# Altium PCB LED_Sequencer.PcbDoc
Units mil, origin at the board's own origin, x right, y up, seen from the top; angles counter-clockwise.
Board outline 4330.71 x 2066.93 mil, 2 copper layers (Top Layer, Bottom Layer); 27 components, 26 nets, 75 pads, 7 vias.
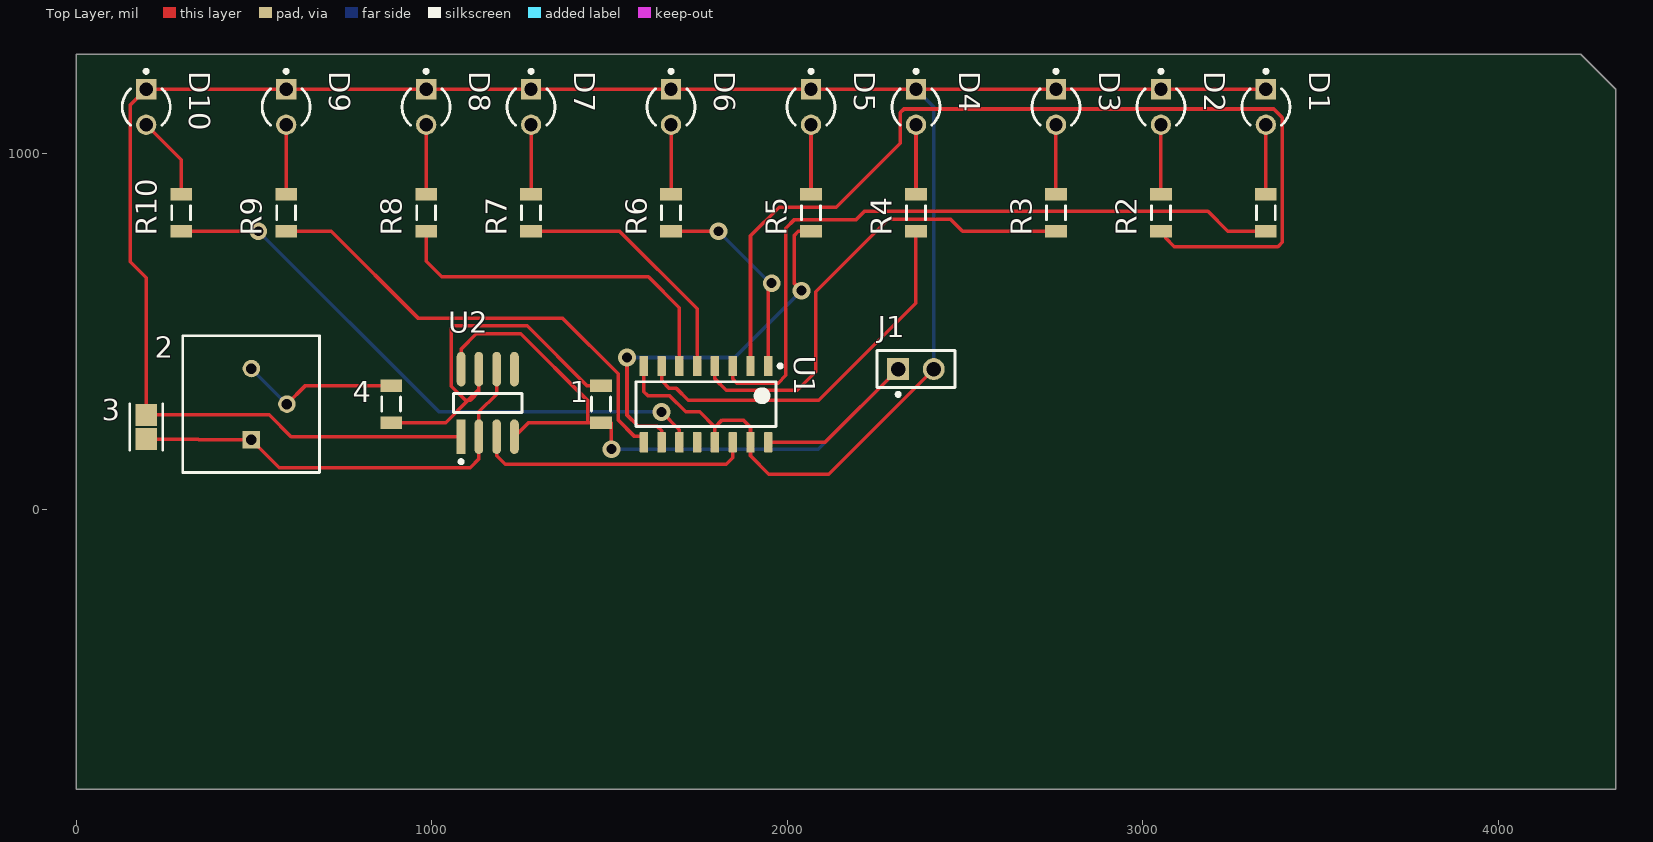
[diagram p0: Top Layer view]
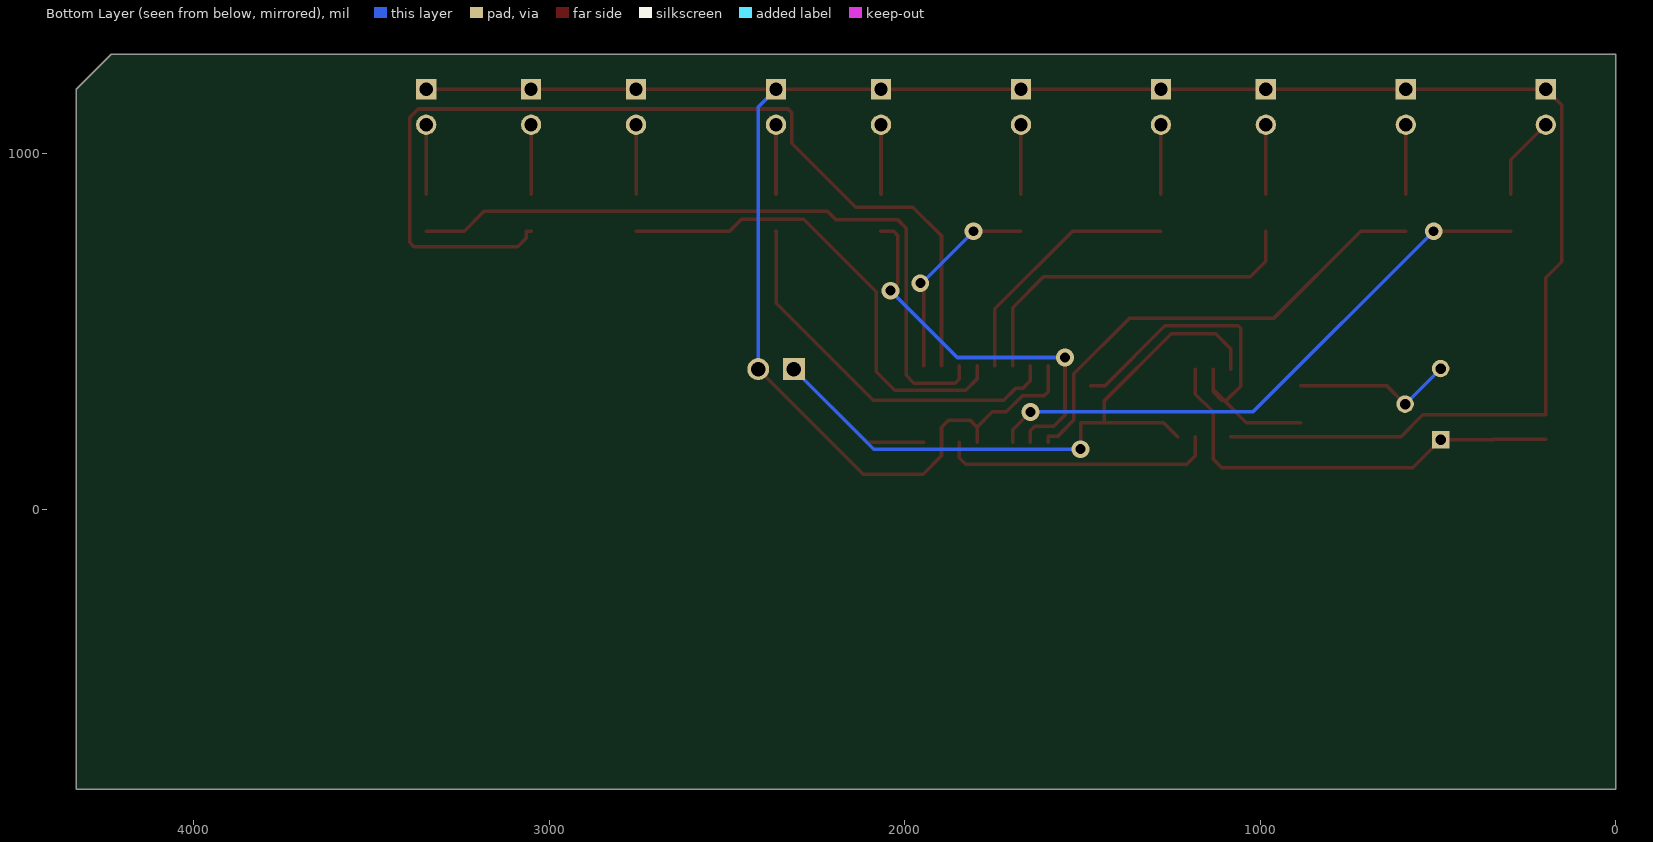
[diagram p1: Bottom Layer view, seen from below]
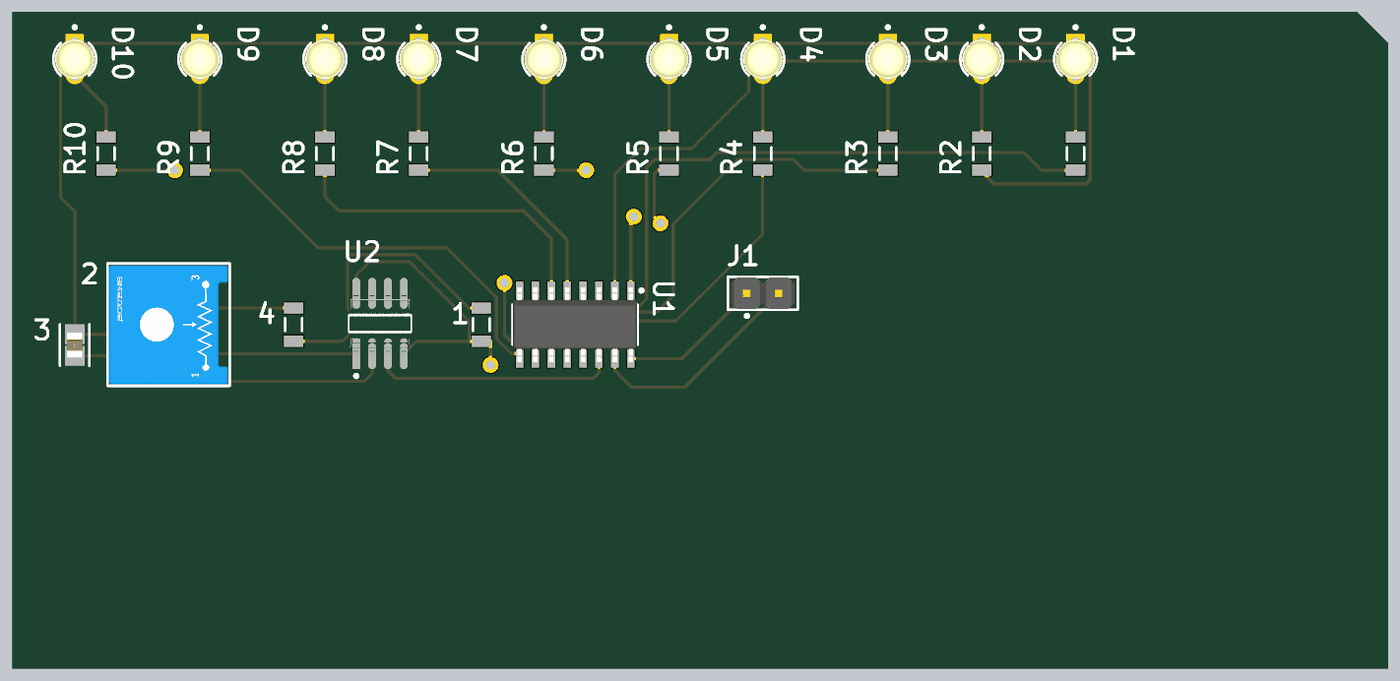
[diagram p2: 3D render of the assembled board from above, using the file's embedded part models]

## Layer stack, top to bottom
Top Solder: solder mask 0.4, Solder Resist, Dk 3.5
Top Layer: signal copper 1.4
Dielectric 1: dielectric 12.6, FR-4, Dk 4.8
Bottom Layer: signal copper 1.4
Bottom Solder: solder mask 0.4, Solder Resist, Dk 3.5

## Board outline
0,1279.53 4232.28,1279.53 4330.71,1181.1 4330.71,-787.4 0,-787.4

## Design rules (kind name [scope] priority, off if disabled: settings)
Clearance [All] p1: gap=10 ignorepadtopadclearanceinfootprint=FALSE
PolygonConnect [All] p1: connectstyle=Relief reliefconductorwidth=10 reliefentries=4 polygonreliefangle="90 Angle" airgapwidth=10
RoutingVias [All] p1: holewidth=28 width=50 viastyle="Through Hole" minholewidth=28 minwidth=50 maxholewidth=28 maxwidth=50
SolderMaskExpansion [All] p1: expansion=4 istentingtop=FALSE
Width [All] p1: maxlimit=10 minlimit=10 preferedwidth=10
30 further rules are at their usual default settings.

## Components (designator, comment, footprint, x,y, rotation, side; value= is the part's Value field where it differs from the comment)
1 "ERJ-8ENF1001V" RESC3216X70X50LL05T20 1476.38,295.28 r90 top
2 "3386P-1-104LF" FP-3386P-MFG 492.13,295.28 r90 top
3 "C2012X5R1E105K125AA" FP-C2012-125-0_2-IPC_A 196.85,230.87 r90 top
4 "ERJ-8ENF1001V" RESC3216X70X50LL05T20 885.83,295.28 r90 top
D1 "HLMP-1719" FP-HLMP-1719-MFG 3346.46,1131.1 r270 top
D2 "HLMP-1719" FP-HLMP-1719-MFG 3051.18,1131.1 r270 top
D3 "HLMP-1719" FP-HLMP-1719-MFG 2755.91,1131.1 r270 top
D4 "HLMP-1719" FP-HLMP-1719-MFG 2362.2,1131.1 r270 top
D5 "HLMP-1719" FP-HLMP-1719-MFG 2066.93,1131.1 r270 top
D6 "HLMP-1719" FP-HLMP-1719-MFG 1673.23,1131.1 r270 top
D7 "HLMP-1719" FP-HLMP-1719-MFG 1279.53,1131.1 r270 top
D8 "HLMP-1719" FP-HLMP-1719-MFG 984.25,1131.1 r270 top
D9 "HLMP-1719" FP-HLMP-1719-MFG 590.55,1131.1 r270 top
D10 "HLMP-1719" FP-HLMP-1719-MFG 196.85,1131.1 r270 top
J1 "M20-9990245" FP-M20-9990245-MFG 2362.2,393.7 r0 top
R1 "ERJ-8ENF1001V" RESC3216X70X50LL05T20 3346.46,833.66 r90 top
R2 "ERJ-8ENF1001V" RESC3216X70X50LL05T20 3051.18,833.66 r90 top
R3 "ERJ-8ENF1001V" RESC3216X70X50LL05T20 2755.91,833.66 r90 top
R4 "ERJ-8ENF1001V" RESC3216X70X50LL05T20 2362.2,833.66 r90 top
R5 "ERJ-8ENF1001V" RESC3216X70X50LL05T20 2066.93,833.66 r90 top
R6 "ERJ-8ENF1001V" RESC3216X70X50LL05T20 1673.23,833.66 r90 top
R7 "ERJ-8ENF1001V" RESC3216X70X50LL05T20 1279.53,833.66 r90 top
R8 "ERJ-8ENF1001V" RESC3216X70X50LL05T20 984.25,833.66 r90 top
R9 "ERJ-8ENF1001V" RESC3216X70X50LL05T20 590.55,833.66 r90 top
R10 "ERJ-8ENF1001V" RESC3216X70X50LL05T20 295.28,833.66 r90 top
U1 "CD4017BM" D0016A_N 1771.65,295.28 r270 top
U2 "NE555DR" FP-D0008A-IPC_A 1157.68,298.68 r90 top

## Footprints (in the part's own frame and the unit in brackets; to place one, negate y for a bottom-side part, rotate by r counter-clockwise, add the part's x,y. Pads: shape width x height; smd on the part's side, far side on the other; paste and mask are expansions set on the pad)
D0016A_N [mm] "SOIC, 16-Leads, Body 10x4mm, Pitch 1.27mm, IPC Medium Density"
  rrect17% 1.45x0.6 smd: 1(-2.725,4.445) 2(-2.725,3.175) 3(-2.725,1.905) 4(-2.725,0.635) 5(-2.725,-0.635) 6(-2.725,-1.905) 7(-2.725,-3.175) 8(-2.725,-4.445) 9(2.725,-4.445) 10(2.725,-3.175) 11(2.725,-1.905) 12(2.725,-0.635) 13(2.725,0.635) 14(2.725,1.905) 15(2.725,3.175) 16(2.725,4.445)
  silkscreen extent -2.85,-5 1.6,5.42, body extent -3,-4.95 3,4.95, height 1.59
FP-3386P-MFG [mm]
  rect 1.25x1.25 hole 0.75 paste-2539.97 mask+0: 1(-2.54,-0.015)
  round 1.25 hole 0.75 paste-2539.97 mask+0: 2(0,-2.555) 3(2.54,-0.015)
  silkscreen extent -4.89,-4.89 4.89,4.89, body extent -4.99,-4.99 4.99,4.99, height 0.25
FP-C2012-125-0_2-IPC_A [mil]
  rect 62.13x61.27 smd paste+0 mask+0: 1(-34.02,0) 2(34.02,0)
  silkscreen extent -65,-46 65,46, body extent -85,-50 85,50, height 10
FP-D0008A-IPC_A [mil]
  rect 97.21x24.49 smd paste+0 mask+0: 1(-95.02,75)
  rrect100% 97.21x24.49 smd paste+0 mask+0: 2(-95.02,25) 3(-95.02,-25) 4(-95.02,-75) 5(95.02,-75) 6(95.02,-25) 7(95.02,25) 8(95.02,75)
  silkscreen extent -170,-97 27,97, body extent -163,-116 163,116, height 10
FP-HLMP-1719-MFG [mm]
  rect 1.45x1.45 hole 0.95 paste-2539.97 mask+0: 1(-1.27,0)
  round 1.45 hole 0.95 paste-2539.97 mask+0: 2(1.27,0)
  silkscreen extent -2.67,-1.71 1.3,1.71, body extent -2.22,-2.22 2.22,2.22, height 0.25
FP-M20-9990245-MFG [mm]
  rect 1.57x1.57 hole 1.02 paste-2539.97 mask+0: 1(-1.27,0)
  round 1.57 hole 1.02 paste-2539.97 mask+0: 2(1.27,0)
  silkscreen extent -2.79,-1.92 2.79,1.32, body extent -2.89,-1.42 2.89,1.42, height 0.25
RESC3216X70X50LL05T20 [mm] "Chip Resistor, 2-Leads, Body 3.20x1.60mm, IPC High Density"
  rect 0.9x1.55 smd: 1(-1.325,0) 2(1.325,0)
  silkscreen extent -0.5,-0.67 0.5,0.68, body extent -1.63,-0.82 1.62,0.82, height 0.7

## Part data
1 4 R1 R2 R3 R4 R5 R6 R7 R8 R9 R10: library part CMP-2003-00017-1, Manufacturer=Panasonic, Part Number=ERJ-8ENF1001V
2: library part CMP-2000-05592-8, "TRIMMER 100K OHM 0.5W PC PIN TOP", Color=Blue, Manufacturer Series=3386, Max Operating Temperature=125°C, Max Power Dissipation=500mW, Min Operating Temperature=-55°C, Package Quantity=100, Resistance=100kR, Resistance Law=Linear, Resistance Tolerance=10%, Resistor Type=Cermet, Temperature Coefficient=100ppm/°C, Voltage Rating=300V, Actuator Orientation=Vertical, Actuator Type=SCREW, Contact Plating=Tin, Depth=9.53mm, Height=4.83mm, Lead Free="Contains Lead", Length=9.53mm, Military Standard=Not, Mount="Through Hole", Number of Pins=3, Number of Terminals/Pins=3, Number of Turns=1, Packaging=Rail/Tube, Power Rating=500mW, Radiation Hardening=No, Reach SVHC Compliant=Yes, RoHS Compliant=Yes, Series="Trimpot® 3386 - Sealed", Taper=Linear, Technology=CERMET, Terminal Finish=Tin, Termination=Pin, Tolerance=10%, Type=Potentiometer, Weight=0.03oz, Width=9.53mm
3: library part CMP-08246-005389-1, "Multilayer Ceramic Capacitors 1μF ±10% 25V X5R SMD 0805", Capacitance=1uF, Case Code (Imperial)=0805, Case Code (Metric)=2012, Dielectric=X5R, Dielectric Material=Ceramic, Max Operating Temperature=85°C, Min Operating Temperature=-55°C, Package Quantity=2000, Tolerance=10%, Voltage=25V, Case/Package=0805, Construction=Flat, Depth=1.25mm, Height=1.25mm, Lead Free="Lead Free", Length=2mm, Mount="Surface Mount", Number of Pins=2, Packaging="Tape and Reel", Radiation Hardening=No, REACH SVHC="No SVHC", Resistor Type=Ceramic, RoHS Compliant=Yes, Series=C, Termination=SMD/SMT, Thickness=0.057inch, Voltage Rating=25V, Voltage Rating (DC)=25V, Weight=0.000194oz, Width=0.049inch
D1 D2 D3 D4 D5 D6 D7 D8 D9 D10: library part CMP-2000-06410-2, "LED YELLOW DIFFUSED T-1 T/H", Colour=Yellow, Forward Current=2mA, Forward Voltage=1.8V, Manufacturer=Broadcom, Package=0, Power Dissipation=17.5mW, Reverse Voltage=5V, Temperature="-40°C to +100°C", Temperature Range High=+100°C, Temperature Range Low=-40°C, Automotive=No, Category=Diode, ComponentLink2Description=Datasheet, ComponentLink2URL=https://docs.broadcom.com/docs/AV02-1557EN, Device Class L1=Optoelectronics, Device Class L2=LEDs, Device Class L3=unset, Digikey Description="LED YELLOW DIFFUSED T-1 T/H", Lead Free=Yes, Led Orientation=Straight, Luminous Intensity=2.1mcd, Manufacturer Part Number=HLMP-1719, Mouser Description="Standard LEDs - Through Hole Yellow Diffused 585nm 2.1mcd", Octopart=https://octopart.com/hlmp-1719-broadcom-71130405, RoHS=TRUE, Viewing Angle=50°, Wavelength=585nm
J1: library part CMP-15831-000105-1, "CONN HEADER VERT 2POS 2.54MM", Case/Package=SIL, Color=Black, Contact Resistance=25mR, Current=3A, Flammability Rating="UL94 V-0", Insulation Resistance=10GR, Max Operating Temperature=105°C, Min Operating Temperature=-40°C, Package Quantity=1000, Voltage=50V, Voltage Rating (AC)=750V, Connector Type="Male Pin", Contact Finish - Mating=GOLD, Contact Material=Brass, Contact Mating Length=0.24inch, Contact Plating=Gold, Contact Shape=Square, Contact Type="Male Pin", Current Rating=3A, Depth=2.54mm, Fastening Type=Pull, Gender=Male, Height=0.12inch, Housing Color=Black, Housing Material=Nylon, Insulation Color=Black, Insulation Material=Nylon, Lead Pitch=2.54mm, Length=5.08mm, Mated Stacking Heights=16.54mm, Mating Cycles=300, Max Current Rating=3A, Mount="Through Hole", Number of Contacts=2, Number of Poles=2, Number of Positions=2, Number of Rows=1, Orientation=Straight, Packaging=Bulk, Pitch=2.54mm, Radiation Hardening=No, Reach SVHC Compliant=Yes, Series=M20, Termination=Solder, Weight=0.25lb, Width=0.25inch, Working Voltage=750V
U1: library part CMP-1623-00071-2, "CMOS Decade Counter with 10 Decoded Outputs, D0016A, TUBE", F @ Nom Voltage(Max)(Mhz)=8, Generic Part Number=CD4017B, ICC @ Nom Voltage(Max)(mA)=0.03, Manufacturer="Texas Instruments", Operating Temperature Range(C)="-55 to 125", Rating=Military, tpd @ Nom Voltage(Max)(ns)=270, Voltage(Nom)(V)=10, Bits(#)=10, Code_JEDEC="MS-012 variation AC", DatasheetVersion=SCHS027C, Function=Counter, Input Type=CMOS, Inputs=1, Output Drive (IOL/IOH)(Max)(mA)=1.5/-1.5, Output Type=CMOS, PackageReference=D0016A, Schmitt Trigger=No, Technology Family=CD4000, Type=Decade, VCC(Max)(V)=18, VCC(Min)(V)=3
U2: library part CMP-1685-00007-2, "IC OSC SGL TIMER 100KHZ 8-SOIC", Case/Package=SOIC, Frequency=100kHz, High Level Output Current=-200mA, Low Level Output Current=200mA, Max Operating Temperature=70°C, Max Supply Voltage=16V, Min Operating Temperature=0°C, Min Supply Voltage=4.5V, Operating Supply Current=10mA, Package Quantity=2500, Quiescent Current=15mA, Contact Plating=Gold, Height=1.58mm, Lead Free="Lead Free", Length=4.9mm, Mount="Surface Mount", Number of Pins=8, Number of Timers/Counters=1, Packaging="Tape and Reel", Radiation Hardening=No, REACH SVHC="No SVHC", Weight=0.002561oz, Width=3.91mm

## Via types
v1: diameter 50, hole 28, Top Layer to Bottom Layer, 7 vias

## Nets (pads, with @x,y where several pads share a name; then routed paths per layer and width w, separated by ;. In a path a pad name is that pad's centre, name@x,y a point inside that pad or via, vN(x,y) a via of type N, cw(c..) or ccw(c..) an arc to the next point about the centre after c; other vN are vias at no path point)
GND: 3.2 D1.1 D2.1 D3.1 D4.1 D5.1 D6.1 D7.1 D8.1 D9.1 D10.1 J1.2 U1.8 U1.13 U1.15 U2.1 | length 7034.6
  Top Layer w10: U2.1 1082.68,203.39 604.35,203.39 542.85,264.89 3.2 196.85,650.89 152.35,695.39 152.35,1136.6 D10.1 D9.1 D8.1 D7.1 D6.1 D5.1 D4.1 D3.1 D2.1 D1.1 ; U1.8 1596.65,330.09 1607.38,319.36 1668.35,319.36 1714.31,273.39 1753.65,273.39 1796.65,230.39 ; U1.13 1796.65,230.39 ; J1.2 2116.93,98.43 1948.35,98.43 1896.65,150.12 U1.15 1896.65,230.39 1876.65,250.39 1816.65,250.39 1796.65,230.39
  Bottom Layer w10: D4.1 2412.2,1131.1 J1.2
Net1_2: 1.2 4.1 U2.7 | length 1108.6
  Top Layer w10: 4.1 1039.06,243.11 1102.68,306.72 ; U2.7 1132.68,336.72 ; 1.2 1436.3,347.44 1268.35,515.39 1062.35,515.39 1055.35,508.39 1055.35,345.39 1094.02,306.72 1102.68,306.72 ; 1102.68,306.72 1109.01,306.72 1132.68,330.39 1132.68,336.72 ; 1102.68,306.72 1132.68,336.72
Net2_1: 2.1 3.1 U2.2 U2.6 | length 1252.9
  Top Layer w10: 3.1 343.35,196.85 344.92,195.28 2.1 571.6,116.39 1108.35,116.39 1132.68,140.72 U2.2 1132.68,273.39 1182.68,323.39 U2.6
Net2_2: 2.2 2.3 4.2 | length 456.4
  Top Layer w10: 2.2 644.88,347.44 4.2
  Bottom Layer w10: 2.3 492.72,394.91 592.35,295.28 2.2
NetD1_2: D1.2 R1.2 | length 195.3
  Top Layer w10: R1.2 D1.2
NetD2_2: D2.2 R2.2 | length 195.3
  Top Layer w10: R2.2 D2.2
NetD3_2: D3.2 R3.2 | length 195.3
  Top Layer w10: R3.2 D3.2
NetD4_2: D4.2 R4.2 | length 195.3
  Top Layer w10: R4.2 D4.2
NetD5_2: D5.2 R5.2 | length 195.3
  Top Layer w10: R5.2 D5.2
NetD6_2: D6.2 R6.2 | length 195.3
  Top Layer w10: R6.2 D6.2
NetD7_2: D7.2 R7.2 | length 195.3
  Top Layer w10: R7.2 D7.2
NetD8_2: D8.2 R8.2 | length 195.3
  Top Layer w10: R8.2 D8.2
NetD9_2: D9.2 R9.2 | length 195.3
  Top Layer w10: R9.2 D9.2
NetD10_2: D10.2 R10.2 | length 236
  Top Layer w10: D10.2 295.28,982.68 R10.2
NetR1_1: R1.1 U1.3 | length 2006.9
  Top Layer w10: U1.3 1846.65,366.09 1858.35,354.39 1974.35,354.39 1996.35,376.39 1996.35,790.39 2020.35,814.39 2194.35,814.39 2217.35,837.39 3183.45,837.39 3239.35,781.5 R1.1
NetR2_1: R2.1 U1.2 | length 2796.1
  Top Layer w10: U1.2 1896.65,768.7 1977.35,849.39 2138.35,849.39 2318.35,1029.39 2318.35,1115.39 2328.35,1125.39 3368.35,1125.39 3392.35,1101.39 3392.35,750.39 3380.35,738.39 3088.35,738.39 3064.35,762.39 3064.35,781.5 R2.1
NetR3_1: R3.1 U1.4 | length 1353.9
  Top Layer w10: U1.4 1796.65,366.09 1828.35,334.39 2028.35,334.39 2080.35,386.39 2080.35,611.39 2284.35,815.39 2459.35,815.39 2493.24,781.5 R3.1
NetR4_1: R4.1 U1.7 | length 1094.9
  Top Layer w10: U1.7 1646.65,361.05 1668.35,339.36 1688.35,339.36 1721.31,306.39 2088.35,306.39 2361.35,579.39 2361.35,781.5 R4.1
NetR5_1: R5.1 U1.10 | length 1094.2
  Top Layer w10: v1(1549.35,426.39) 1549.35,264.59 1580.54,233.39 1633.65,233.39 1646.65,220.39 U1.10 ; v1(2040.35,614.39) 2020.35,634.39 2020.35,770.39 2031.45,781.5 R5.1
  Bottom Layer w10: v1(1549.35,426.39) 1852.35,426.39 v1(2040.35,614.39)
NetR6_1: R6.1 U1.1 | length 580.5
  Top Layer w10: R6.1 v1(1806.35,781.5) ; U1.1 1946.65,625.7 v1(1956.35,635.39)
  Bottom Layer w10: v1(1806.35,781.5) 1952.45,635.39 v1(1956.35,635.39)
NetR7_1: R7.1 U1.5 | length 718.2
  Top Layer w10: R7.1 1528.35,781.5 1746.65,563.19 U1.5
NetR8_1: R8.1 U1.6 | length 1014.6
  Top Layer w10: R8.1 984.35,781.5 984.35,697.39 1028.35,653.39 1609.65,653.39 1696.65,566.39 U1.6
NetR9_1: R9.1 U1.9 | length 1337.7
  Top Layer w10: R9.1 717.35,781.5 961.45,537.39 1367.35,537.39 1524.35,380.39 1524.35,250.39 1570.35,204.39 1596.65,204.39 U1.9
NetR10_1: R10.1 U1.11 | length 1667.8
  Top Layer w10: R10.1 v1(512.35,781.5) ; v1(1646.35,273.39) 1696.65,223.09 U1.11
  Bottom Layer w10: v1(512.35,781.5) 1020.45,273.39 v1(1646.35,273.39)
NetU1_14: U1.14 U2.3 | length 778.2
  Top Layer w10: U2.3 1182.68,150.39 1206.68,126.39 1828.65,126.39 1846.65,144.39 U1.14
VCC: 1.1 J1.1 U1.16 U2.4 U2.8 | length 2284.5
  Top Layer w10: U2.8 1082.68,450.39 1125.1,492.82 1250.92,492.82 1438.35,305.39 1438.35,243.11 ; U2.4 1272.13,243.11 1438.35,243.11 ; v1(1505.35,168.39) 1505.35,243.11 1.1 1438.35,243.11 ; U1.16 2106.49,187.99 J1.1
  Bottom Layer w10: v1(1505.35,168.39) 2086.9,168.39 J1.1
pads on no net: U1.12 U2.5